# EAGLE board RGB LED Driver (EAGLE 9.3.2)
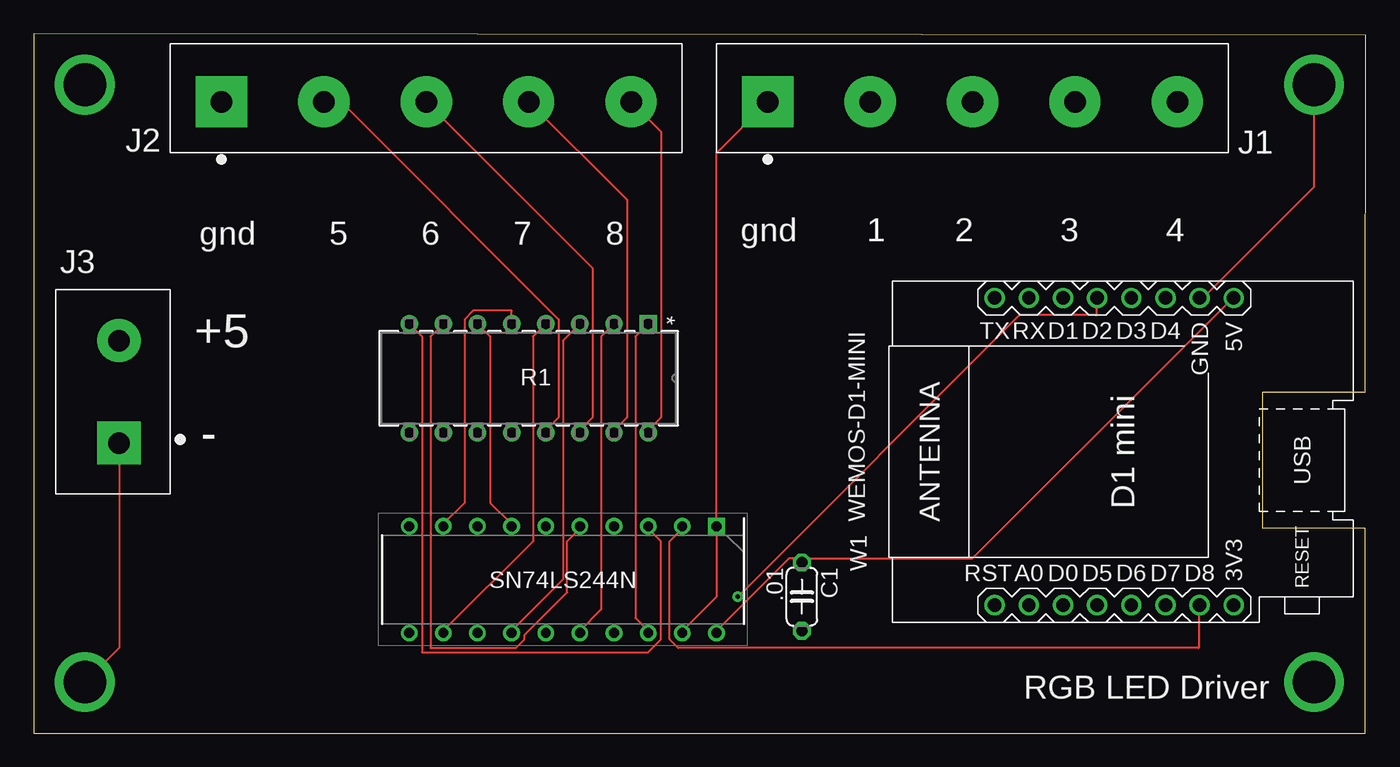
[diagram p0: board, top side]
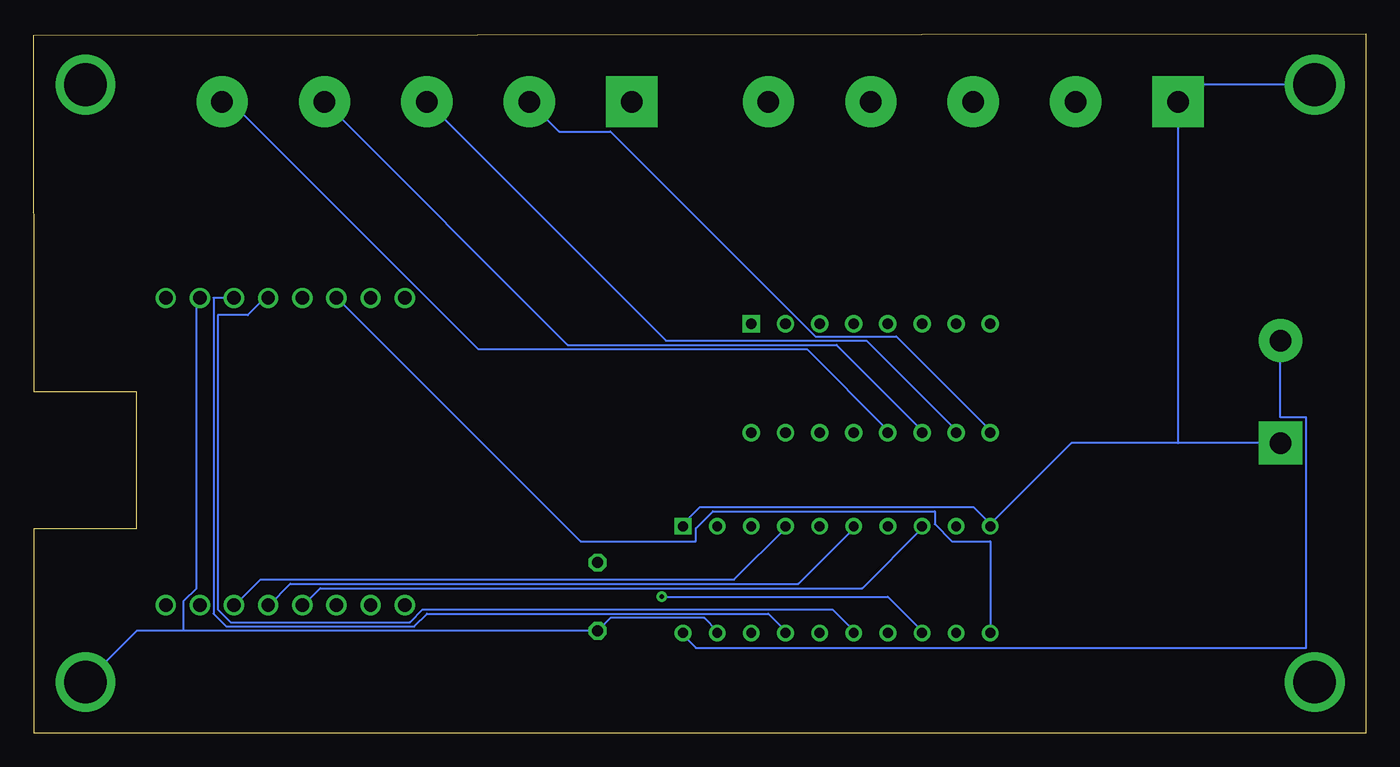
[diagram p1: board, bottom side, seen from below]

Size 99.11 x 52.06 mm. Coordinates in mm from the lower left corner, seen from the top.
Outline: 0,0 99.06,0 99.06,15.24 91.44,15.24 91.44,25.4 99.06,25.4 99.11,51.93 0,52.06 0,0
Copper layers (1*16): Top 0.035mm / dielectric 1.5mm / Bottom 0.035mm
Design rules "default": minimum track width 6mil, minimum drill 0.35mm, track to track 6mil, track to pad 6mil, pad to pad 6mil, via to via 6mil, smd to smd 6mil, copper to edge 40mil, drill to drill 6mil, minimum pad ring 10mil, minimum via ring 8mil, stop-mask expansion 4mil, vias tented up to drill 0mil, thermal gap 10mil

## Footprints (pad centres in the part's own frame; a part is rotated, then mirrored left to right if it is on the bottom)
C050-024X044 = drill 0.813 octagon: 1 -2.54,0; 2 2.54,0
DIP794W53P254L2540H508Q20N = drill 0.73 pad 1.13 square: 1 -3.97,11.43 | drill 0.73 pad 1.13: 2 -3.97,8.89; 3 -3.97,6.35; 4 -3.97,3.81; 5 -3.97,1.27; 6 -3.97,-1.27; 7 -3.97,-3.81; 8 -3.97,-6.35; 9 -3.97,-8.89; 10 -3.97,-11.43; 11 3.97,-11.43; 12 3.97,-8.89; 13 3.97,-6.35; 14 3.97,-3.81; 15 3.97,-1.27; 16 3.97,1.27; 17 3.97,3.81; 18 3.97,6.35; 19 3.97,8.89; 20 3.97,11.43
TERMINALBLOCK_PLUGGABLE-5-7.62MM = drill 1.6 pad 3.81 square: 1 -15.24,0 | drill 1.6 pad 3.81: 2 -7.62,0; 3 0,0; 4 7.62,0; 5 15.24,0
TERMINALBLOCK_PLUGGABLE-2-7.62MM = drill 1.6 pad 3.2 square: 1 -3.81,0 | drill 1.6 pad 3.2: 2 3.81,0
BEAGLEBONEBLACK_MOUNTING_HOLE = drill 3.175 pad 4.445: P$1 0,0
BO_4116R = drill 0.787 pad 1.295 square: 1 0,0 | drill 0.787 pad 1.295: 2 0,-2.54; 3 0,-5.08; 4 0,-7.62; 5 0,-10.16; 6 0,-12.7; 7 0,-15.24; 8 0,-17.78; 9 8.128,-17.78; 10 8.128,-15.24; 11 8.128,-12.7; 12 8.128,-10.16; 13 8.128,-7.62; 14 8.128,-5.08; 15 8.128,-2.54; 16 8.128,0
WEMOS-D1-MINI = drill 1: JP1.1 -11.43,9.525; JP1.2 -11.43,6.985; JP1.3 -11.43,4.445; JP1.4 -11.43,1.905; JP1.5 -11.43,-0.635; JP1.6 -11.43,-3.175; JP1.7 -11.43,-5.715; JP1.8 -11.43,-8.255; JP2.1 11.43,9.525; JP2.2 11.43,6.985; JP2.3 11.43,4.445; JP2.4 11.43,1.905; JP2.5 11.43,-0.635; JP2.6 11.43,-3.175; JP2.7 11.43,-5.715; JP2.8 11.43,-8.255

## Placement (x,y rotation side)
C1  .01  [C050-024X044]  57.15,10.16 270 top
IC1  SN74LS244N  [DIP794W53P254L2540H508Q20N]  39.37,11.43 270 top
J1  691311400105  [TERMINALBLOCK_PLUGGABLE-5-7.62MM]  69.85,46.99 0 top
J2  691311400102  [TERMINALBLOCK_PLUGGABLE-2-7.62MM]  6.35,25.4 90 top
J3  691311400105  [TERMINALBLOCK_PLUGGABLE-5-7.62MM]  29.21,46.99 0 top
MGT1  BEAGLEBONEBLACK_MOUNTING_HOLE  [BEAGLEBONEBLACK_MOUNTING_HOLE]  3.81,48.26 0 top
MGT2  BEAGLEBONEBLACK_MOUNTING_HOLE  [BEAGLEBONEBLACK_MOUNTING_HOLE]  3.81,3.81 0 top
MGT3  BEAGLEBONEBLACK_MOUNTING_HOLE  [BEAGLEBONEBLACK_MOUNTING_HOLE]  95.25,3.81 0 top
MGT4  BEAGLEBONEBLACK_MOUNTING_HOLE  [BEAGLEBONEBLACK_MOUNTING_HOLE]  95.25,48.26 0 top
R1  4116R-1-331LF  [BO_4116R]  45.72,30.48 270 top
W1  WEMOS-D1-MINI  [WEMOS-D1-MINI]  81.03,20.96 90 top

## Library data of the parts
C1 = rcl; SPICEPREFIX: C
IC1 = SamacSys_Parts; DESCRIPTION: Buffers, Drivers, Receivers, Transceivers DIP-20 RoHS; HEIGHT: 5.08mm; MANUFACTURER_NAME: Texas Instruments; MANUFACTURER_PART_NUMBER: SN74LS244N; MOUSER_PART_NUMBER: 595-SN74LS244N; MOUSER_PRICE-STOCK: https://www.mouser.com/Search/Refine.aspx?Keyword=595-SN74LS244N
J1 J3 = Terminal Blocks; CREATED_BY: PCBLayout.com; DIGIKEY_PART_NO: 732-2826-ND; MANUFACTURER: WURTH ELEKTRONIK; MPN: 691311400105
J2 = Terminal Blocks; CREATED_BY: PCBLayout.com; DIGIKEY_PART_NO: 732-2823-ND; MANUFACTURER: WURTH ELEKTRONIK; MPN: 691311400102
MGT1-MGT4 = BeagleBone_Black_Wireless
R1 = Bourns_4116R-1-331LF; BUILT_BY: EMA_UL_Team; MANUFACTURER_PART_NUMBER: 4116R-1-331LF; SOURCELIBRARY: Bourns_2014-12-31; VENDOR: Bourns Electronics
W1 = diy-modules

## Nets
3V3: W1.JP1.8
+5V: C1.1 IC1.20 J2.2 W1.JP2.8
D1: IC1.11 W1.JP2.3
D2: IC1.13 W1.JP2.4
D3: IC1.15 W1.JP2.5
D4: IC1.17 W1.JP2.6
D5: IC1.8 W1.JP1.4
D6: IC1.6 W1.JP1.5
D7: IC1.4 W1.JP1.6
D8: IC1.2 W1.JP1.7
GND: C1.2 IC1.1 IC1.10 IC1.19 J1.1 J2.1 J3.1 MGT1.P$1 MGT2.P$1 MGT3.P$1 MGT4.P$1 W1.JP2.7
N$1: IC1.12 R1.4
N$2: IC1.14 R1.3
N$3: IC1.16 R1.2
N$4: IC1.18 R1.1
N$5: J3.5 R1.16
N$6: J3.4 R1.15
N$7: J3.3 R1.14
N$8: IC1.7 R1.6
N$9: IC1.9 R1.5
N$10: J3.2 R1.13
N$11: IC1.5 R1.7
N$12: IC1.3 R1.8
N$15: J1.5 R1.12
N$16: J1.4 R1.11
N$19: J1.3 R1.10
N$20: J1.2 R1.9

## Tracks (layer width: path | path; a pad name or v marks a point on that pad's centre or on a via)
+5V
  Top 0.152: 57.15,13.02 56.2,13.02 50.8,7.62 IC1.20 | 57.15,13.02 69.85,13.02 89.22,32.39 W1.JP2.8 | 57.15,13.02 C1.1
  Bottom 0.152: J2.2 6.35,23.5 4.45,23.5 4.45,6.35 49.85,6.35 50.8,7.3 IC1.20
D1
  Bottom 0.152: IC1.11 27.94,14.29 30.8,14.29 32.07,15.56 32.07,16.51 48.58,16.51 49.85,15.24 49.85,14.29 58.42,14.29 76.52,32.39 W1.JP2.3
D2  (via drill 0.35)
  Top 0.152: v52.39,10.16 73.34,31.11 79.06,31.11 79.06,32.39 W1.JP2.4
  Bottom 0.152: v52.39,10.16 35.56,10.16 33.02,7.62 IC1.13
D3
  Bottom 0.152: IC1.15 38.1,7.62 39.69,9.21 70.17,9.21 71.12,8.25 84.45,8.25 85.41,9.21 85.41,31.11 83.19,31.11 81.92,32.39 W1.JP2.5
D4
  Bottom 0.152: W1.JP2.6 85.73,32.39 85.73,8.89 84.77,7.94 70.8,7.94 69.85,8.89 44.45,8.89 43.18,7.62 IC1.17
D5
  Bottom 0.152: IC1.8 33.02,15.24 37.47,10.79 77.79,10.79 79.06,9.52 W1.JP1.4
D6
  Bottom 0.152: IC1.6 38.1,15.24 42.23,11.11 80.01,11.11 81.6,9.52 W1.JP1.5
D7
  Bottom 0.152: IC1.4 43.18,15.24 46.99,11.43 82.23,11.43 84.14,9.52 W1.JP1.6
D8
  Top 0.152: IC1.2 48.26,15.24 47.31,14.29 47.31,6.98 47.94,6.35 86.68,6.35 86.68,9.52 W1.JP1.7
GND
  Top 0.152: MGT2.P$1 6.35,6.35 J2.1 | MGT4.P$1 95.25,40.64 87,32.39 W1.JP2.7 | IC1.19 48.26,7.62 50.8,10.16 IC1.1 50.8,43.18 J1.1
  Bottom 0.152: MGT1.P$1 12.7,48.26 J3.1 13.97,21.59 | 27.94,15.56 21.91,21.59 13.97,21.59 | J2.1 13.97,21.59 | IC1.19 48.26,7.62 49.21,8.57 56.2,8.57 C1.2 87.95,7.62 | MGT3.P$1 91.44,7.62 87.95,7.62 | 87.95,7.62 87.95,9.84 87,10.79 87,32.39 W1.JP2.7 | 27.94,15.56 29.21,16.83 49.53,16.83 50.8,15.56 IC1.1 | 27.94,15.56 IC1.10
N$1
  Top 0.152: R1.4 37.15,29.53 37.15,14.29 30.48,7.62 IC1.12
N$2
  Top 0.152: R1.3 39.37,29.21 39.37,11.43 35.56,7.62 IC1.14
N$3
  Top 0.152: R1.2 42.23,29.53 42.23,9.21 40.64,7.62 IC1.16
N$4
  Top 0.152: R1.1 44.77,29.53 44.77,8.57 45.72,7.62 IC1.18
N$5
  Top 0.152: J3.5 46.67,44.77 46.67,23.5 45.72,22.54 R1.16
N$6
  Top 0.152: J3.4 44.13,39.69 44.13,23.5 43.18,22.54 R1.15
N$7
  Top 0.152: J3.3 41.59,34.61 41.59,23.5 40.64,22.54 R1.14
N$8
  Top 0.152: R1.6 33.97,29.53 33.97,17.14 35.56,15.56 IC1.7
N$9
  Top 0.152: R1.5 35.56,31.43 32.7,31.43 32.07,30.8 32.07,17.14 30.48,15.56 IC1.9
N$10
  Top 0.152: J3.2 22.86,46.99 39.05,30.8 39.05,23.5 38.1,22.54 R1.13
N$11
  Top 0.152: R1.7 29.53,29.53 29.53,6.35 35.88,6.35 36.51,6.98 36.51,7.3 39.69,10.48 39.69,14.29 40.64,15.24 IC1.5
N$12
  Top 0.152: R1.8 28.89,29.53 28.89,6.03 45.72,6.03 46.67,6.98 46.67,14.29 45.72,15.24 IC1.3
N$15
  Bottom 0.152: J1.5 84.45,46.99 66.04,28.57 41.59,28.57 35.56,22.54 R1.12
N$16
  Bottom 0.152: J1.4 59.37,28.89 39.37,28.89 33.02,22.54 R1.11
N$19
  Bottom 0.152: J1.3 52.07,29.21 37.15,29.21 30.48,22.54 R1.10
N$20
  Bottom 0.152: J1.2 60.01,44.77 56.2,44.77 40.96,29.53 34.93,29.53 27.94,22.54 R1.9

## Text on the board
tNames: gnd | 1 | 2 | 3 | 4 | gnd | 5 | 6 | 7 | 8 | +5 | - | RGB LED Driver